# EAGLE board WillowModule_v2 (EAGLE 7.3.0)
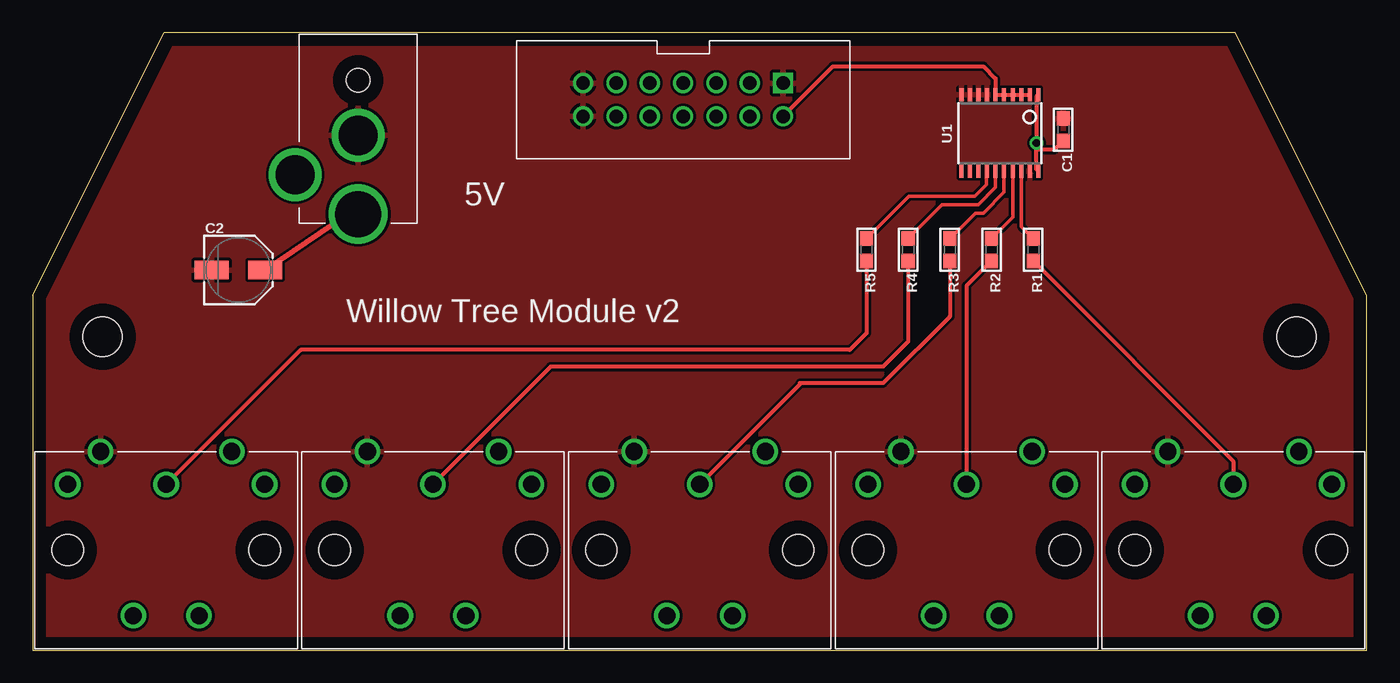
[diagram p0: board, top side]
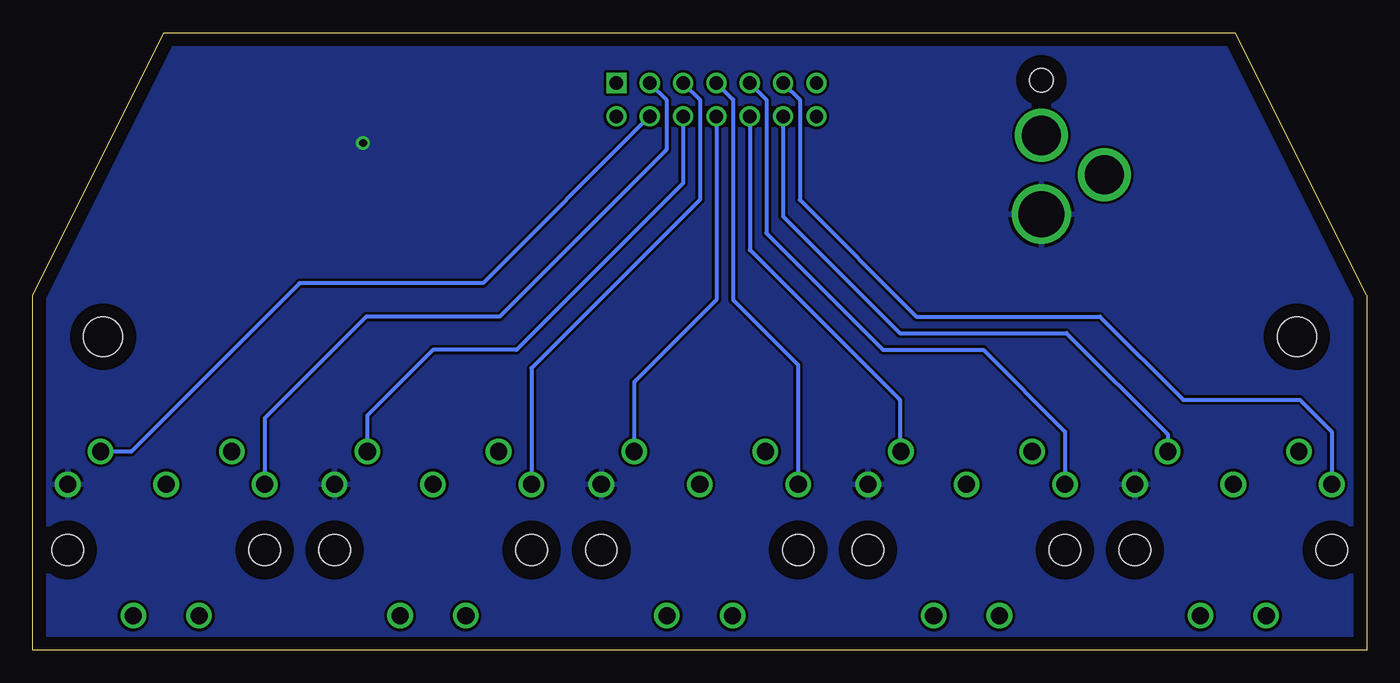
[diagram p1: board, bottom side, seen from below]

Size 101.6 x 47 mm. Coordinates in mm from the lower left corner, seen from the top.
Outline: 0,0 101.6,0 101.6,27 91.6,47 10,47 0,27 0,0
Copper layers (1*16): Top 0.035mm / dielectric 1.5mm / Bottom 0.035mm
Design rules "default": minimum track width 10mil, minimum drill 24mil, track to track 8mil, track to pad 8mil, pad to pad 8mil, via to via 8mil, smd to smd 8mil, copper to edge 40mil, drill to drill 8mil, minimum pad ring 10mil, minimum via ring 8mil, stop-mask expansion 4mil, vias tented up to drill 0mil, thermal gap 10mil
Holes 3 mm at 5.31,23.86 96.25,23.86

## Footprints (pad centres in the part's own frame; a part is rotated, then mirrored left to right if it is on the bottom)
0603 = smd 1.1 x 1: 1 -0.85,0; 2 0.85,0
PANASONIC_C = smd 2.6 x 1.4: + 2.05,0; - -2.05,0
IDC-BOX-HEADER = drill 1.02 square: P1 -7.62,-1.27 | drill 1.02: P2 -7.62,1.27; P3 -5.08,-1.27; P4 -5.08,1.27; P5 -2.54,-1.27; P6 -2.54,1.27; P7 0,-1.27; P8 0,1.27; P9 2.54,-1.27; P10 2.54,1.27; P11 5.08,-1.27; P12 5.08,1.27; P13 7.62,-1.27; P14 7.62,1.27
TSSOP20 = smd 0.305 x 0.991: 1 -2.925,-2.918; 2 -2.275,-2.918; 3 -1.625,-2.918; 4 -0.975,-2.918; 5 -0.325,-2.918; 6 0.325,-2.918; 7 0.975,-2.918; 8 1.625,-2.918; 9 2.275,-2.918; 10 2.925,-2.918; 11 2.925,2.918; 12 2.275,2.918; 13 1.625,2.918; 14 0.975,2.918; 15 0.325,2.918; 16 -0.325,2.918; 17 -0.975,2.918; 18 -1.625,2.918; 19 -2.275,2.918; 20 -2.925,2.918
PJ-050AH = drill 3: GND -3,0; GNDBREAK 0,-4.8 | drill 3.5: PWR 3,0 | hole 1.8: -7.2,0
SDS-50J = drill 1.3: P1 7.5,5; P2 0,5; P3 -7.5,5; P4 5,7.5; P5 -5,7.5; P6 -2.5,-5; P7 2.5,-5 | hole 2.4: -7.5,0; 7.5,0

## Placement (x,y rotation side)
C1  0.1uF  [0603]  78.49,39.62 270 top
C2  47uF  [PANASONIC_C]  15.66,28.94 0 top
JP1  [IDC-BOX-HEADER]  49.53,41.91 180 top
R1  [0603]  76.2,30.48 270 top
R2  [0603]  73.03,30.48 270 top
R3  [0603]  69.85,30.48 270 top
R4  [0603]  66.67,30.48 270 top
R5  [0603]  63.5,30.48 270 top
U1  SN74LV245  [TSSOP20]  73.66,39.37 180 top
U$1  [PJ-050AH]  24.78,36.2 270 top
VINE1  [SDS-50J]  91.44,7.62 0 top
VINE2  [SDS-50J]  71.12,7.62 0 top
VINE3  [SDS-50J]  50.8,7.62 0 top
VINE4  [SDS-50J]  30.48,7.62 0 top
VINE5  [SDS-50J]  10.16,7.62 0 top

## Library data of the parts
C1 C2 R1-R5 U1 = microbuilder
JP1 U$1 VINE1-VINE5 = Custom

## Nets
CLK: JP1.P2 U1.2 U1.3 U1.4 U1.5 U1.6
CLK1: R1.2 VINE1.P2
CLK2: R2.2 VINE2.P2
CLK3: R3.2 VINE3.P2
CLK4: R4.2 VINE4.P2
CLK5: R5.2 VINE5.P2
GND: C1.1 C2.- JP1.P1 JP1.P13 JP1.P14 U1.7 U1.8 U1.9 U1.10 U1.19 U$1.GND VINE1.P5 VINE2.P5 VINE3.P5 VINE4.P5 VINE5.P5
GNDBREAK: U$1.GNDBREAK
N$23: R1.1 U1.18
N$24: R2.1 U1.17
N$25: R3.1 U1.16
N$26: R4.1 U1.15
N$27: R5.1 U1.14
S1: JP1.P4 VINE1.P4
S2: JP1.P6 VINE2.P4
S3: JP1.P8 VINE3.P4
S4: JP1.P10 VINE4.P4
S5: JP1.P12 VINE5.P4
VCC: C1.2 C2.+ U1.1 U1.20 U$1.PWR VINE1.P1 VINE2.P1 VINE3.P1 VINE4.P1 VINE5.P1
VIB1: JP1.P3 VINE1.P3
VIB2: JP1.P5 VINE2.P3
VIB3: JP1.P7 VINE3.P3
VIB4: JP1.P9 VINE4.P3
VIB5: JP1.P11 VINE5.P3

## Tracks (layer width: path | path; a pad name or v marks a point on that pad's centre or on a via)
CLK
  Top 0.254: 73.41,42.29 75.31,42.29 | U1.3 75.31,42.29 | 75.31,42.29 75.82,42.29
  Top 0.305: U1.2 U1.3 U1.4 U1.5 U1.6 73.33,43.51 72.39,44.45 60.96,44.45 JP1.P2
CLK1
  Top 0.305: R1.2 91.44,14.39 VINE1.P2
CLK2
  Top 0.305: R2.2 71.12,27.73 VINE2.P2
CLK3
  Top 0.305: R3.2 69.85,25.4 64.77,20.32 58.42,20.32 58.42,20.24 VINE3.P2
CLK4
  Top 0.305: R4.2 66.67,23.5 64.77,21.59 39.45,21.59 VINE4.P2
CLK5
  Top 0.305: R5.2 63.5,24.13 62.23,22.86 20.4,22.86 VINE5.P2
GND
  pour Top: 0,46.99 101.6,46.99 101.6,0 0,0
N$23
  Top 0.254: U1.18 75.28,32.24 R1.1
N$24
  Top 0.254: U1.17 74.64,32.94 R2.1
N$25
  Top 0.254: U1.16 73.98,34.87 72.39,33.27 71.79,33.27 R3.1
N$26
  Top 0.254: U1.15 73.33,35.23 72.01,33.91 69.25,33.91 R4.1
N$27
  Top 0.254: U1.14 72.64,36.41 72.64,35.43 71.75,34.54 66.71,34.54 R5.1
S1
  Bottom 0.305: JP1.P4 67.31,27.94 81.28,27.94 94.1,15.12 VINE1.P4
S2
  Bottom 0.305: JP1.P6 52.07,35.56 64.77,22.86 71.12,22.86 76.12,17.86 VINE2.P4
S3
  Bottom 0.305: JP1.P8 49.53,26.67 55.8,20.4 VINE3.P4
S4
  Bottom 0.305: JP1.P10 46.99,30.48 35.56,19.05 35.56,15.24 35.48,15.16 VINE4.P4
S5
  Bottom 0.305: JP1.P12 44.45,33.02 35.56,24.13 22.86,24.13 15.16,16.43 VINE5.P4
VCC  (via drill 0.6)
  Top 0.305: U1.20 76.45,36.58 76.45,38.1 | 76.45,38.1 v76.45,38.61 76.45,42.16 U1.1 | C1.2 77.81,38.1 76.45,38.1
  Top 0.406: C2.+ 23.96,33.2 U$1.PWR
  pour Bottom: 0,46.99 101.6,46.99 101.6,0 0,0
VIB1
  Bottom 0.305: JP1.P3 53.34,41.91 53.34,38.1 66.04,25.4 76.2,25.4 83.94,17.66 VINE1.P3
VIB2
  Bottom 0.305: JP1.P5 50.8,41.91 50.8,34.29 63.62,21.47 VINE2.P3
VIB3
  Bottom 0.305: JP1.P7 48.26,41.91 48.26,26.67 43.3,21.71 VINE3.P3
VIB4
  Bottom 0.305: JP1.P9 45.72,41.91 45.72,31.75 36.83,22.86 29.21,22.86 22.98,16.63 VINE4.P3
VIB5
  Bottom 0.305: JP1.P11 43.18,41.91 43.18,34.29 34.29,25.4 20.32,25.4 13.97,19.05 5.08,19.05 2.66,16.63 VINE5.P3

## Text on the board
tPlace: 5V | Willow Tree Module v2